# Altium PCB PCB1.PcbDoc
Units mm, origin at the board's own origin, x right, y up, seen from the top; angles counter-clockwise.
Board outline 85 x 66 mm, 2 copper layers (Top Layer, Bottom Layer), stack 1.071 mm thick; 39 components, 42 nets, 267 pads, 84 vias.
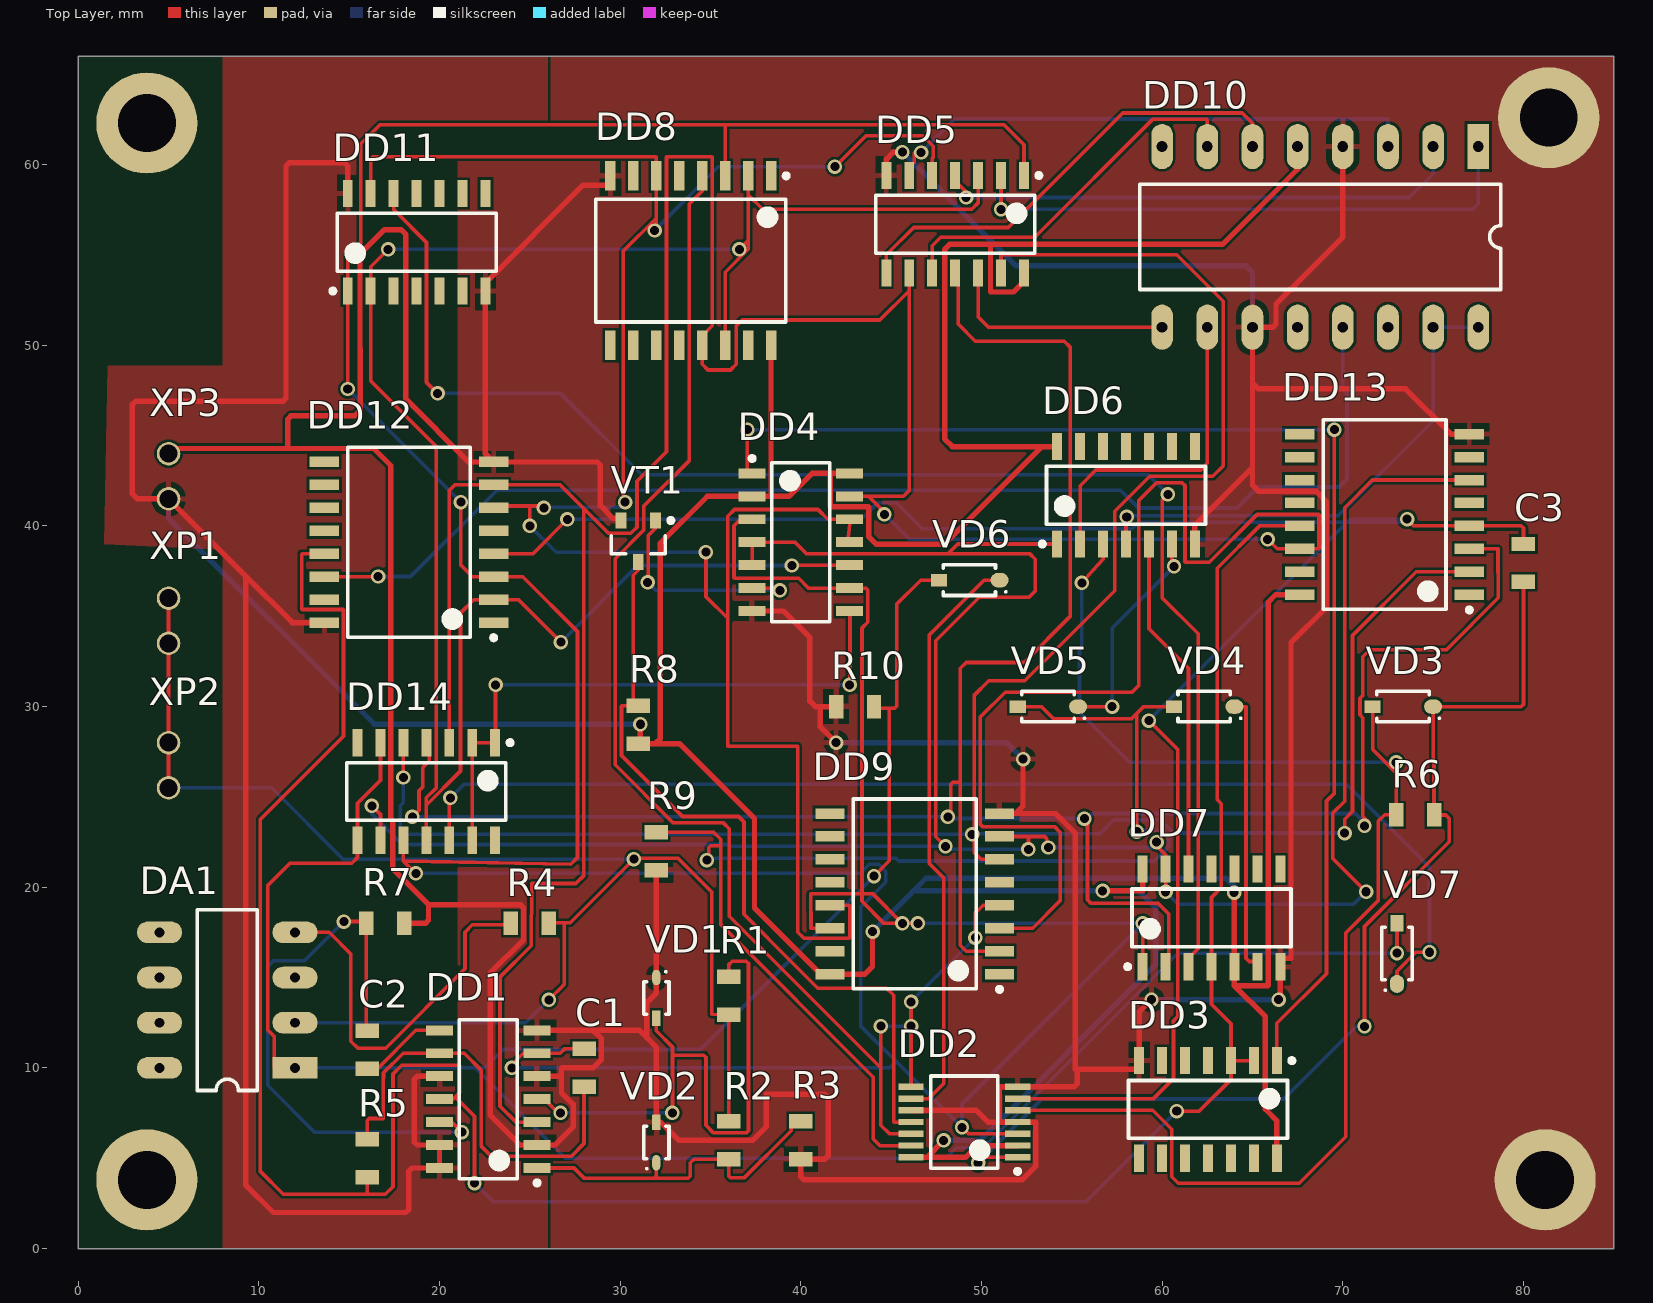
[diagram p0: Top Layer view]
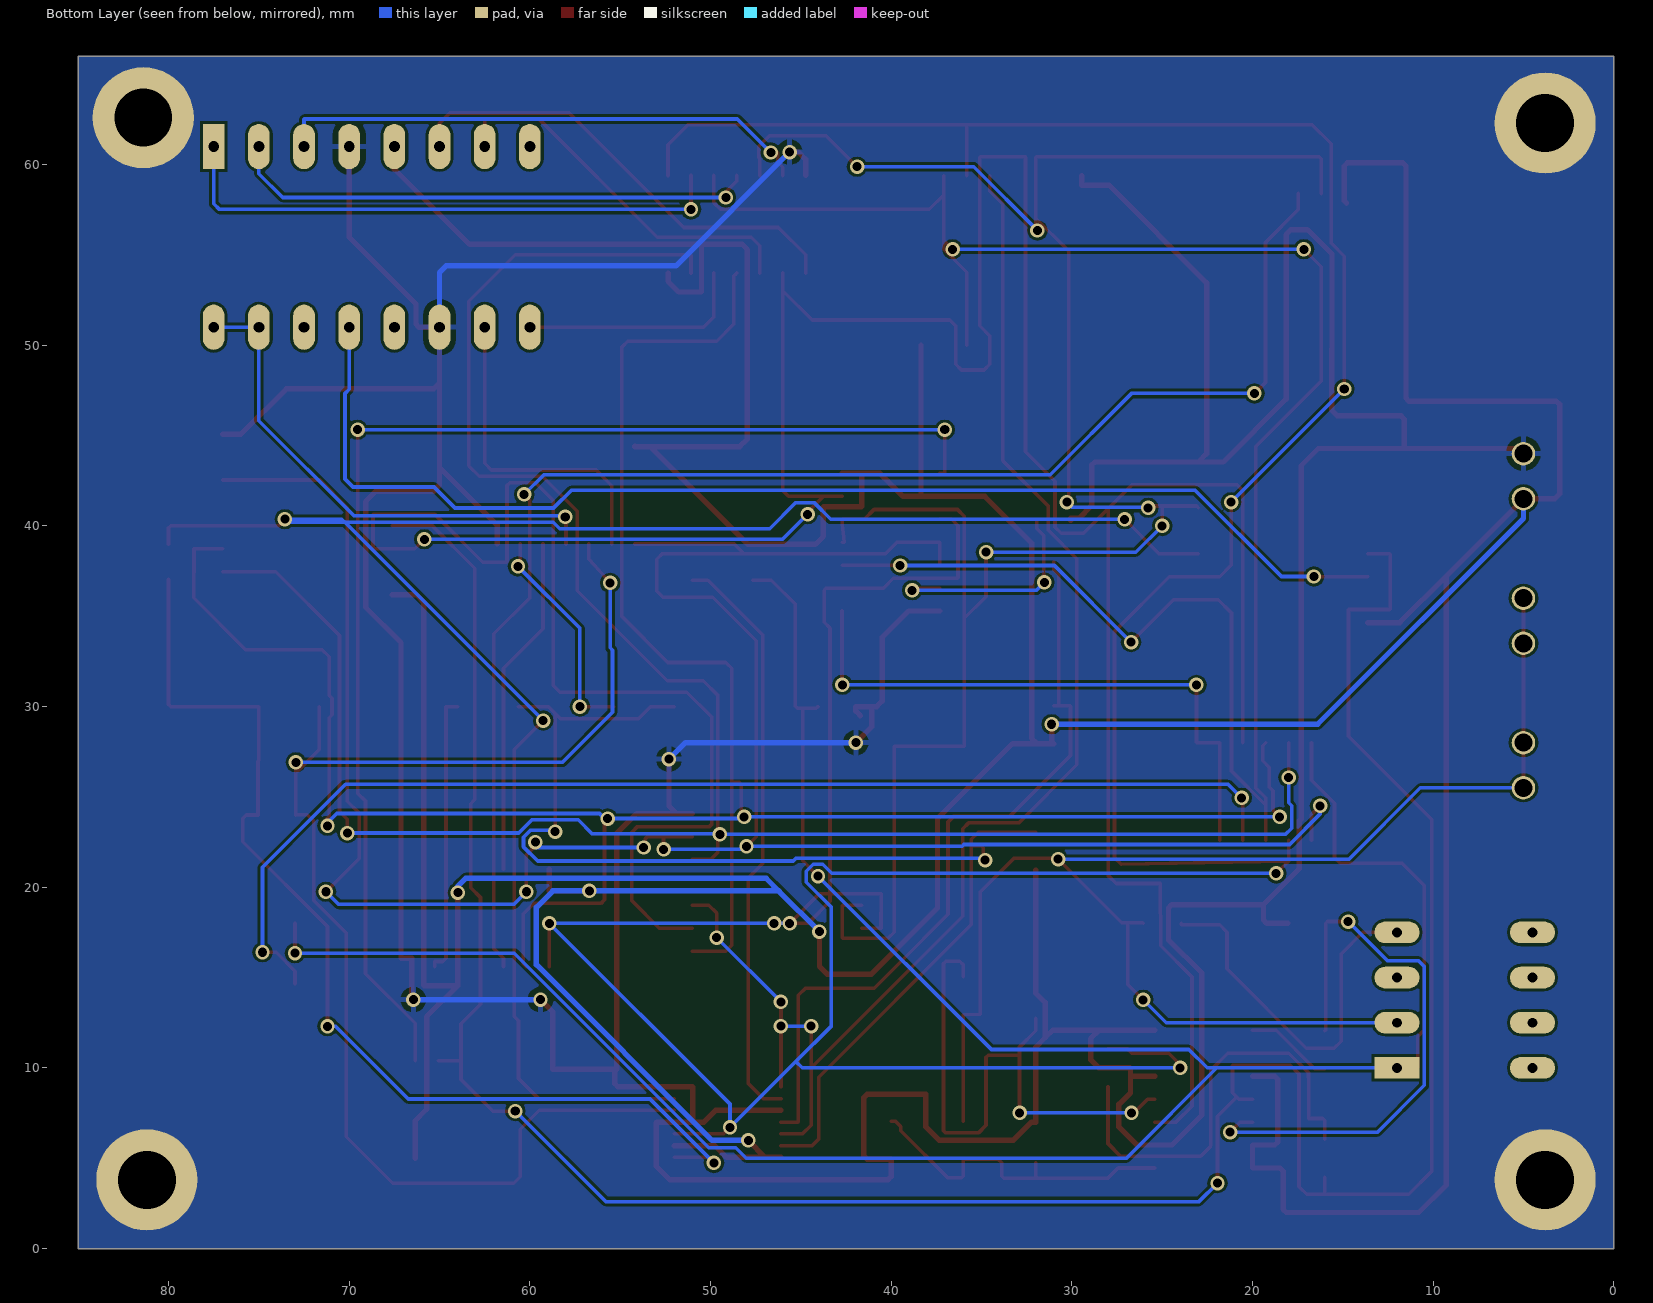
[diagram p1: Bottom Layer view, seen from below]
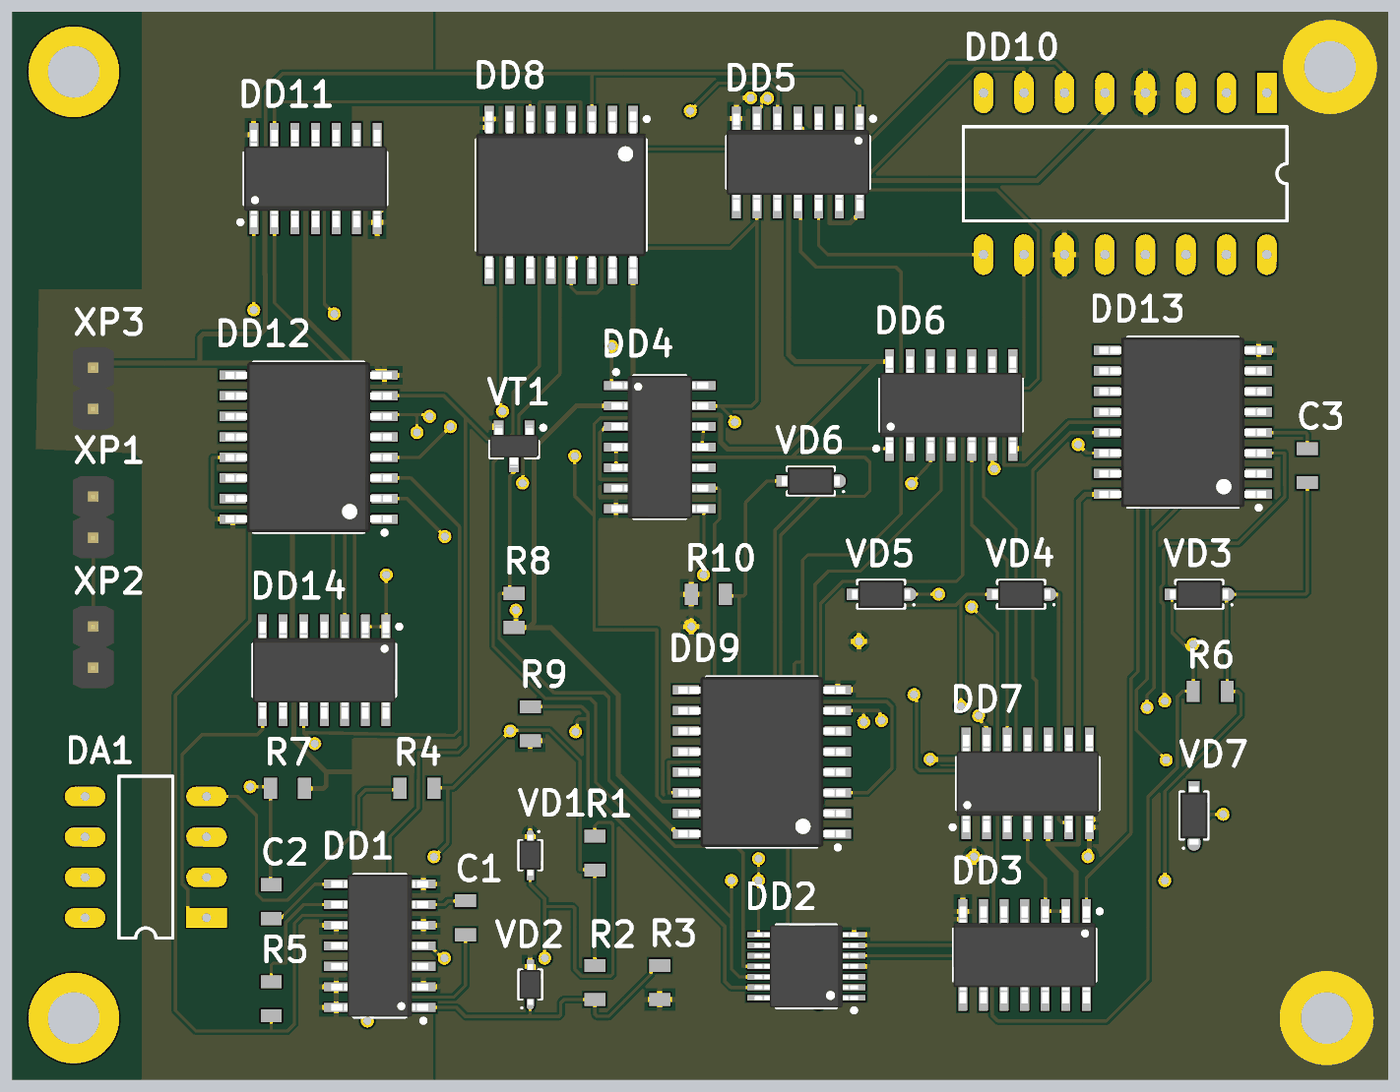
[diagram p2: 3D render of the assembled board from above, using the file's embedded part models]

## Layer stack, top to bottom
Top Solder: solder mask 0.0102, Solder Resist, Dk 3.5
Top Layer: signal copper 0.0356
Dielectric 1: dielectric 1, FR-4, Dk 4.8
Bottom Layer: signal copper 0.0356
Bottom Solder: solder mask 0.0102, Solder Resist, Dk 3.5

## Board outline
0,0 85,0 85,66 0,66

## Design rules (kind name [scope] priority, off if disabled: settings)
Clearance [All] p1: gap=0.15 ignorepadtopadclearanceinfootprint=FALSE
ComponentClearance [All] p1: gap=0 collisioncheckmode=3 verticalgap=0.254 showdistances=FALSE
HoleSize [All] p1: absolutevalues=TRUE maxlimit=3 minlimit=0.5 maxpercent=80.000 minpercent=20.000
PolygonConnect [All] p1: connectstyle=Relief reliefconductorwidth=0.3 reliefentries=4 polygonreliefangle="90 Angle" airgapwidth=0.3
RoutingVias [All] p1: holewidth=0.5 width=0.8 viastyle="Through Hole" minholewidth=0.4 minwidth=0.6 maxholewidth=0.4 maxwidth=0.6
SolderMaskExpansion [All] p1: expansion=0.102 istentingtop=FALSE
Width Width_VCC_GND [InNetClass('VCC/GND')] p1: maxlimit=0.3 minlimit=0.3 preferedwidth=0.3
Width [All] p2: maxlimit=0.25 minlimit=0.15 preferedwidth=0.2
28 further rules are at their usual default settings.

## Classes and differential pairs
net class VCC/GND: GND VCC

## Components (designator, comment, footprint, x,y, rotation, side; value= is the part's Value field where it differs from the comment)
C1 "С-0805 50 В 1 мкФ 10% X7R Hitano" 0805 28,10 r90 top value="1 мкФ"
C2 "С-0805 50 В 1 мкФ 10% X7R Hitano" 0805 16,11 r90 top value="1 мкФ"
C3 "С-0805 50 В 1 мкФ 10% X7R Hitano" 0805 80,37.95 r270 top value="1 мкФ"
DA1 "КР1014КТ1А Электроника и связь" DIP8 12,10 r180 top
DD1 "74HC86D Philips" SOIC-14 25.4,4.46 r180 top
DD2 "74HCT74PW NXP" TSSOP-14 52,5.05 r180 top
DD3 "CD74AC02M96 TI" SOIC-14 66.35,10.4 r270 top
DD4 "SN74HC10QDREP Texas Instruments" SOIC-14 37.3,42.91 r0 top
DD5 "TC74AC04F Toshiba" SOIC-14 52.35,59.4 r270 top
DD6 "TC74AC04F Toshiba" SOIC-14 54.19,39 r90 top
DD7 "SN74HC10QDREP Texas Instruments" SOIC-14 58.92,15.6 r90 top
DD8 "74AC191SC Fairchild" SOIC-16 38.35,59.38 r270 top
DD9 "74AC191SC Fairchild" SOIC-16 51,15.19 r180 top
DD10 "CD4061A NXP" DIP16 77.5,61 r270 top
DD11 "SN74HC10QDREP Texas Instruments" SOIC-14 14.92,53 r90 top
DD12 "74AC191SC Fairchild" SOIC-16 23,34.65 r180 top
DD13 "74AC191SC Fairchild" SOIC-16 77,36.19 r180 top
DD14 "SN74HC10QDREP Texas Instruments" SOIC-14 23.08,28 r270 top
R1 "R-0805 0,125 Вт 390 кОм 5 % Hitano" 0805 36,14 r90 top value="390 кОм"
R2 "R-0805 0,125 Вт 433,5 кОм 5 % Hitano" 0805 36,6 r90 top value="433,5 кОм"
R3 "R-0805 0,125 Вт 76,5 кОм 5 % Hitano" 0805 40,6 r90 top value="76,5 кОм"
R4 "R-0805 0,125 Вт 39 кОм 5 % Hitano" 0805 25,18 r180 top value="39 кОм"
R5 "R-0805 0,125 Вт 100 кОм 5 % Hitano" 0805 16,5 r270 top value="100 кОм"
R6 "R-0805 0,125 Вт 82 кОм 5 % Hitano" 0805 74,24 r0 top value="82 кОм"
R7 "R-0805 0,125 Вт 82 кОм 5 % Hitano" 0805 17,18 r0 top value="82 кОм"
R8 "R-0805 0,125 Вт 100 кОм 5 % Hitano" 0805 31,29 r270 top value="100 кОм"
R9 "R-0805 0,125 Вт 100 кОм 5 % Hitano" 0805 32,22 r270 top value="100 кОм"
R10 "R-0805 0,125 Вт 100 кОм 5 % Hitano" 0805 43,30 r0 top value="100 кОм"
VD1 "BZX384 NXP" SOD-323 32,15 r270 top
VD2 "BZX384 NXP" SOD-323 32,4.75 r90 top
VD3 "1N4148W Yangjie" SOD-123 75,30 r180 top
VD4 "1N4148W Yangjie" SOD-123 64,30 r180 top
VD5 "1N4148W Yangjie" SOD-123 55.35,30 r180 top
VD6 "1N4148W Yangjie" SOD-123 51,37 r180 top
VD7 "1N4148W Yangjie" SOD-123 73,14.65 r90 top
VT1 "BC856B Infineon" SOT-23 31.95,40.3 r270 top
XP1 "DS1021 Ningbo Zhenqin Electronic" PLS-2 5,36 r270 top
XP2 "DS1021 Ningbo Zhenqin Electronic" PLS-2 5,25.5 r90 top
XP3 "DS1021 Ningbo Zhenqin Electronic" PLS-2 5,41.5 r90 top

## Footprints (in the part's own frame and the unit in brackets; to place one, negate y for a bottom-side part, rotate by r counter-clockwise, add the part's x,y. Pads: shape width x height; smd on the part's side, far side on the other; paste and mask are expansions set on the pad)
0805 [mm]
  rect 0.8x1.3 smd: 1(-1.05,0) 2(1.05,0)
  body extent -1.03,-0.65 1.07,0.65, height 0.4
DIP8 [mm]
  rect 2.5x1.2 hole 0.55: 1(0,0)
  oval 2.5x1.2 hole 0.55: 2(0,-2.5) 3(0,-5) 4(0,-7.5) 5(7.5,-7.5) 6(7.5,-5) 7(7.5,-2.5) 8(7.5,0)
  silkscreen extent 2.08,-8.75 5.42,1.25, body extent 0.83,-8.7 6.83,1.3, height 5
DIP16 [mm]
  rect 2.5x1.2 hole 0.6: 1(0,0)
  oval 2.5x1.2 hole 0.6: 2(0,-2.5) 3(0,-5) 4(0,-7.5) 5(0,-10) 6(0,-12.5) 7(0,-15) 8(0,-17.5) 9(10,-17.5) 10(10,-15) 11(10,-12.5) 12(10,-10) 13(10,-7.5) 14(10,-5) 15(10,-2.5) 16(10,0)
  silkscreen extent 2.08,-18.75 7.91,1.25, body extent 0.43,-18.72 9.43,1.27, height 5
PLS-2 [mm]
  round 1.3 hole 1: 1(0,0) 2(2.5,0)
  body extent -1.31,-1.27 3.77,1.27, height 8.47
SOD-123 [mm] "SODFL, 2-Leads, Body 1,55x3,60mm, IPC Medium Density"
  oval 1x0.8 smd: 1(0,0)
  rect 0.9x0.7 smd: 2(3.35,0)
  silkscreen extent -0.4,-0.85 3.12,0.85, body extent -0.12,-0.85 3.47,0.85, height 1.35
SOD-323 [mm] "SODFL, 2-Leads, Body 1,25x2,50mm, IPC Medium Density"
  oval 0.85x0.45 smd: 1(0,0)
  rect 0.85x0.45 smd: 2(2.25,0)
  silkscreen extent -0.37,-0.7 2.02,0.7, body extent -0.13,-0.67 2.37,0.67, height 1.1
SOIC-14 [mm] "SOIC, 14-Leads, Body 8,65x3,90mm, Pitch 1,27mm, IPC Medium Density"
  rect 1.5x0.55 smd: 1(0,0) 2(0,-1.27) 3(0,-2.54) 4(0,-3.81) 5(0,-5.08) 6(0,-6.35) 7(0,-7.62) 8(5.4,-7.62) 9(5.4,-6.35) 10(5.4,-5.08) 11(5.4,-3.81) 12(5.4,-2.54) 13(5.4,-1.27) 14(5.4,0)
  silkscreen extent -0.13,-8.21 4.3,0.95, body extent -0.3,-8.21 5.7,0.59, height 1.75
SOIC-16 [mm] "SOIC, 16-Leads, Body 10,30x7,50mm, Pitch 1,27mm, IPC Medium Density"
  rect 1.62x0.58 smd: 1(0,0) 2(0,-1.27) 3(0,-2.54) 4(0,-3.81) 5(0,-5.08) 6(0,-6.35) 7(0,-7.62) 8(0,-8.89) 9(9.38,-8.89) 10(9.38,-7.62) 11(9.38,-6.35) 12(9.38,-5.08) 13(9.38,-3.81) 14(9.38,-2.54) 15(9.38,-1.27) 16(9.38,0)
  silkscreen extent -0.12,-9.7 8.09,0.97, body extent -0.46,-9.69 9.84,0.8, height 2.65
SOT-23 [mm] "SOT23, 3-Leads, Body 2,90x2,30mm, Pitch 0,95mm, IPC Medium Density"
  rect 0.9x0.6 smd: 1(0,0) 2(0,-1.9) 3(2.3,-0.95)
  silkscreen extent -0.12,-2.45 1.85,0.98, body extent -0.15,-2.45 2.45,0.55, height 1.1
TSSOP-14 [mm] "TSOP, 14-Leads, Body 5,00x4,40mm, Pitch 0,65mm, IPC Medium Density"
  rect 1.4x0.35 smd: 1(0,0) 2(0,-0.65) 3(0,-1.3) 4(0,-1.95) 5(0,-2.6) 6(0,-3.25) 7(0,-3.9) 8(5.9,-3.9) 9(5.9,-3.25) 10(5.9,-2.6) 11(5.9,-1.95) 12(5.9,-1.3) 13(5.9,-0.65) 14(5.9,0)
  silkscreen extent -0.13,-4.5 4.8,0.9, body extent -0.25,-4.5 6.15,0.6, height 1.1

## Part data
C1 C2 C3: library part "C-0805 1 мкФ", Manufacturer=Hitano, Package=С-0805, Temp_Coef=X7R, Tolerance=10%, Voltage="50 В"
DA1: library part КР1014КТ1А, Manufacturer="Электроника и связь", Name=КР1014КТ1А
DD1: library part 74HC86D, "OR", Manufacturer=Philips, Name=74HC86D
DD2: library part 74HCT74PW, "DUAL D FF POSEDG TRIG", Manufacturer=NXP, Name=74HCT74PW
DD3: library part CD74AC02M96, "2-INPUT NOR GATE", Manufacturer=TI, Name=CD74AC02M96
DD4 DD7 DD11 DD14: library part SN74HC10QDREP, "3-INPUT NAND GATE", Manufacturer="Texas Instruments", Name=SN74HC10QDREP
DD5 DD6: library part TC74AC04F, "NOT", Manufacturer=Toshiba, Name=TC74AC04F
DD8 DD9 DD12 DD13: library part 74AC191SC, "Counter", Manufacturer=Fairchild, Name=74AC191SC
DD10: library part CD4061A, Manufacturer=NXP, Name=CD4061A
R1: library part "R-0805 390 кОм", Manufacturer=Hitano, Package=R-0805, Power="0,125 Вт", Tolerance="5 %"
R2: library part "R-0805 433,5 кОм", Manufacturer=Hitano, Package=R-0805, Power="0,125 Вт", Tolerance="5 %"
R3: library part "R-0805 76,5 кОм", Manufacturer=Hitano, Package=R-0805, Power="0,125 Вт", Tolerance="5 %"
R4: library part "R-0805 39 кОм", Manufacturer=Hitano, Package=R-0805, Power="0,125 Вт", Tolerance="5 %"
R5 R8 R9 R10: library part "R-0805 100 кОм", Manufacturer=Hitano, Package=R-0805, Power="0,125 Вт", Tolerance="5 %"
R6 R7: library part "R-0805 82 кОм", Manufacturer=Hitano, Package=R-0805, Power="0,125 Вт", Tolerance="5 %"
VD1 VD2: library part BZX384, Manufacturer=NXP, Name=BZX384
VD3 VD4 VD5 VD6 VD7: library part 1N4148W, "1N4148W", Manufacturer=Yangjie, Name=1N4148W
VT1: library part BC856B, Manufacturer=Infineon, Name=BC856B
XP1 XP2 XP3: library part DS1021, "PLS-2_1x2", Manufacturer="Ningbo Zhenqin Electronic", Name=DS1021

## Free pads (board coordinates)
  round 5.6 hole 3.2: -(3.8,3.8) -(3.8,62.3) -(81.2,3.8) -(81.4,62.6)

## Via types
v1: diameter 0.8, hole 0.5, Top Layer to Bottom Layer, 84 vias

## Nets (pads, with @x,y where several pads share a name; then routed paths per layer and width w, separated by ;. In a path a pad name is that pad's centre, name@x,y a point inside that pad or via, vN(x,y) a via of type N, cw(c..) or ccw(c..) an arc to the next point about the centre after c; other vN are vias at no path point)
1: C1.2 DD1.6 DD2.3 DD4.3 DD4.9 DD5.1 DD7.1 DD8.3 DD9.14 DD11.1 DD12.3 DD14.10 | length 245.9
  Top Layer w0.2: v1(14.92,47.58) DD11.1 14.92,54.929 15.648,55.657 15.648,61.148 16.7,62.2 35.81,62.2 ; DD14.10 18,21.452 ; v1(18.686,20.766) 18,21.452 ; v1(21.185,41.315) 21.185,37.822 21.817,37.19 DD12.3 24.607,37.19 27.636,34.16 27.636,21.642 27.268,21.274 18,21.452 ; v1(24,10) 24,10.17 24.64,10.81 DD1.6 26.677,10.81 26.917,11.05 C1.2 ; DD8.3 35.81,62.2 ; DD4.3 36.653,40.37 36.3,40.017 36.3,37.124 36.325,37.098 39.879,37.098 40.418,36.56 DD4.9 43.588,36.56 43.7,36.448 43.7,34.66 43.384,34.344 43.384,19.644 ; DD9.14 40.565,17.73 40.54,19.623 43.384,19.644 ; v1(46.483,17.998) v1(45.62,17.998) ; v1(48.922,6.707) 49.279,6.35 DD2.3 ; DD5.1 52.35,61.101 51.251,62.2 35.81,62.2 ; DD7.1 v1(58.92,17.998) ; 43.384,19.644 43.384,19.217 44.604,17.998 v1(45.62,17.998) ; 43.384,19.644 43.969,19.649 v1(45.62,17.998)
  Bottom Layer w0.2: v1(14.92,47.58) v1(21.185,41.315) ; v1(18.686,20.766) 43.283,20.766 43.781,21.264 44.319,21.264 44.7,20.883 44.7,20.278 43.308,18.887 43.308,12.321 45.277,10.352 ; v1(24,10) 44.924,10 45.277,10.352 ; v1(45.62,17.998) v1(46.483,17.998) v1(58.92,17.998) 48.922,7.999 v1(48.922,6.707) 45.277,10.352
2: DD4.10 DD5.3 DD8.2 DD8.14 DD11.2 DD12.2 DD14.11 | length 115.6
  Top Layer w0.2: v1(17.155,55.31) 16.19,54.345 DD11.2 16.19,48.02 19.813,44.397 19.813,25.491 19.27,24.947 19.27,24.541 ; DD14.11 19.27,24.541 ; v1(26.722,33.568) 24.37,35.92 DD12.2 21.896,35.92 21.159,35.183 21.159,26.43 19.27,24.541 ; DD8.14 35.81,54.04 37.08,55.31 37.08,55.788 ; v1(36.603,55.31) 37.08,55.788 ; DD8.2 37.08,58.333 ; v1(39.498,37.81) 39.519,37.83 DD4.10 ; DD5.3 49.81,57.879 49.455,57.524 37.889,57.524 37.08,58.333 ; 37.08,55.788 37.08,58.333
  Bottom Layer w0.2: v1(17.155,55.31) v1(36.603,55.31) ; v1(26.722,33.568) 30.964,37.81 v1(39.498,37.81)
3: DD4.11 DD4.12 DD5.5 DD8.6 DD9.13 DD11.13 DD12.6 | length 122.8
  Top Layer w0.2: DD11.13@16.19,58.866 DD11.13 16.2,58.41 16.2,60.324 16.317,60.441 31.975,60.441 32,60.416 DD8.6 32,57.037 ; DD12.6 23.1,41.1 24.9,41.1 ; v1(25,40) 25,41 24.9,41.1 ; v1(25.772,41) 25.672,41.1 24.9,41.1 ; v1(30.278,41.315) 30.176,41.416 30.176,55.214 32,57.037 ; v1(31.904,56.352) 32,56.448 32,57.037 ; v1(34.748,38.546) 34.748,36.082 35.95,34.881 ; DD9.13 42.673,19 42.699,18.975 42.699,17.21 42.673,17.185 40.159,17.185 39.828,17.515 39.828,27.794 35.95,27.794 35.95,34.881 ; v1(41.886,59.882) 43.604,61.6 46.735,61.6 47.322,61.012 47.322,60.391 47.27,60.339 DD5.5 ; DD4.11 42.587,39.1 42.589,39.113 42.7,40.09 DD4.12 41.485,40.37 40.947,40.908 36.323,40.908 35.95,40.535 35.95,34.881
  Bottom Layer w0.2: v1(25,40) 26.454,38.546 v1(34.748,38.546) ; v1(25.772,41) 25.797,41.025 29.988,41.025 v1(30.278,41.315) ; v1(31.904,56.352) 35.434,59.882 v1(41.886,59.882)
4: DD1.3 DD4.13 DD5.9 DD8.13 DD9.3 DD12.7 DD13.14 DD14.3 | length 212
  Top Layer w0.2: DD14.3 20.54,40.66 20.535,40.665 20.535,41.965 20.84,42.27 DD12.7 26.676,42.27 27.992,40.954 ; DD1.3 24.234,7 23.35,7.884 23.35,15.032 25.071,16.753 25.096,20.207 27.547,20.207 27.992,20.652 27.992,40.954 ; DD4.13 43.74,41.64 ; v1(44.629,40.642) 44.629,40.751 43.74,41.64 ; DD5.9 46,53.024 ; DD9.3 52.83,17.73 54.35,19.25 54.35,23.05 54.043,23.357 50.057,23.357 49.94,23.474 49.94,29.43 51.309,30.799 58.332,30.799 58.701,31.167 58.701,41.406 59.691,42.397 61.103,42.397 61.266,42.234 61.266,38.013 61.291,37.987 62.612,37.987 65.254,40.629 68.657,40.629 68.683,40.604 68.683,38.755 68.657,38.73 DD13.14 66.371,38.73 v1(65.844,39.257) ; 27.992,40.954 29.358,39.588 30.583,39.588 30.928,39.933 30.928,42.473 32.564,44.109 32.564,60.416 32.589,60.441 35.079,60.441 35.104,60.416 35.104,51.074 34.54,50.51 DD8.13 34.54,48.947 34.858,48.63 36.107,48.63 36.425,48.947 36.425,51.068 36.755,51.399 44.374,51.399 46,53.024 ; 43.74,41.64 45.678,41.64 46,41.962 46,53.024
  Bottom Layer w0.2: v1(44.629,40.642) 46.013,39.257 v1(65.844,39.257)
5: DD5.11 DD7.2 DD9.2 DD13.3 DD14.4 | length 144.9
  Top Layer w0.2: v1(18.492,23.89) 18.867,24.265 18.867,25.344 19.067,25.544 19.067,26.623 19.437,26.993 19.437,27.833 19.378,27.892 DD14.4 ; v1(48.134,23.89) 48.301,24.057 48.301,25.687 48.418,25.804 48.832,25.804 ; DD5.11 48.648,53.892 48.707,53.833 48.707,51.174 49.659,50.222 54.587,50.222 54.905,49.904 54.905,34.982 52.365,32.442 49.149,32.442 48.832,32.124 48.832,25.804 ; DD9.2 50.996,16.464 49.157,16.464 48.832,16.789 48.832,25.804 ; v1(55.7,23.8) 55.808,23.692 55.867,23.633 55.867,19.304 56.066,19.104 59.782,19.104 60.357,18.529 60.357,15.767 DD7.2 ; v1(71.2,23.4) 71.367,23.567 71.367,23.663 71.332,23.698 71.11,23.92 71.11,29.386 70.95,29.546 70.95,30.454 71.11,30.614 71.11,32.759 71.504,33.153 75.745,33.153 78.611,36.018 78.588,38.734 77.004,38.734 DD13.3
  Bottom Layer w0.2: v1(18.492,23.89) 18.506,23.904 48.12,23.904 48.22,23.804 55.696,23.804 v1(55.7,23.8) 55.862,23.8 56.144,24.082 70.689,24.082 70.99,23.78 70.99,23.772 71.2,23.562 v1(71.2,23.4)
6: DD5.13 DD9.6 DD13.2 DD14.5 | length 132.3
  Top Layer w0.2: v1(18,26.075) DD14.5 ; v1(49.482,22.925) v1@49.59,22.925 ; DD9.6 49.979,21.54 49.59,21.929 49.59,22.663 v1@49.59,22.925 ; DD5.13 51.08,54.98 51.105,55.005 60.809,55.005 63.374,52.44 63.374,43.321 62.799,42.747 59.313,42.747 57.38,40.813 57.38,36.413 52.401,31.434 50.407,31.434 49.59,30.617 v1@49.59,22.925 ; v1(70.1,23) 70.1,23.771 70.537,24.208 70.537,33.929 74.068,37.46 DD13.2
  Bottom Layer w0.2: v1(18,26.075) 18,24.673 17.832,24.505 17.832,23.266 18.173,22.925 v1(49.482,22.925) ; v1@49.482,22.95 56.55,22.95 57.328,23.728 59.887,23.728 60.614,23 v1(70.1,23)
7: DD4.4 DD4.5 DD6.1 DD7.13 DD9.7 DD13.6 DD14.9 | length 138.1
  Top Layer w0.2: v1(16.257,24.5) 16.73,24.027 DD14.9 ; DD4.5 DD4.4 39.676,39.1 40.306,38.47 48.16,38.47 ; v1(48.007,22.265) 47.474,22.798 47.474,33.644 49.88,36.05 52.63,36.05 52.973,36.393 52.973,38.152 52.655,38.47 48.16,38.47 ; DD9.7 52.5,22.81 ; v1@52.3,22.2 52.4,22.1 v1(52.6,22.1) 52.6,22.71 52.5,22.81 ; v1(53.7,22.2) 53.603,22.297 53.603,22.693 53.486,22.81 52.5,22.81 ; DD6.1 48.69,39 48.16,38.47 ; v1(59.7,22.5) 59.7,22.281 60.19,21.791 DD7.13 v1(60.19,19.75) ; v1(71.286,19.75) 69.45,21.586 69.45,24.103 70.105,24.759 70.105,41.01 71.635,42.54 DD13.6
  Bottom Layer w0.2: v1(16.257,24.5) 16.257,24.049 17.943,22.363 35.966,22.363 36.064,22.265 v1(48.007,22.265) 48.172,22.1 v1(52.6,22.1) ; v1(53.7,22.2) 59.652,22.2 v1@59.717,22.265 ; v1(60.19,19.75) 60.891,19.049 70.585,19.049 v1(71.286,19.75)
8: DD2.8 DD2.12 DD8.4 DD9.4 | length 80.7
  Top Layer w0.2: DD8.4 34.54,58.536 33.834,57.83 33.834,43.626 31.294,41.086 31.294,39.753 29.719,38.178 29.719,26.781 32.94,23.56 35.714,23.56 36.044,23.23 36.044,18.391 44.426,10.009 ; v1(44.426,12.308) 44.426,10.009 ; DD2.12 44.908,6.35 44.426,6.833 44.426,10.009 ; DD2.8 v1(46.1,12.308) 46.1,13.652 v1(46.102,13.654) ; v1(49.658,17.21) 49.658,18.568 50.09,19 DD9.4
  Bottom Layer w0.2: v1(44.426,12.308) v1(46.1,12.308) ; v1(46.102,13.654) v1(49.658,17.21)
9: DD1.11 DD3.2 DD3.3 DD7.4 DD12.13 DD13.13 R5.2 | length 147.7
  Top Layer w0.2: DD12.13 12.396,38.46 12.371,38.435 12.371,35.397 12.396,35.371 14.657,35.371 14.682,35.346 14.682,28.361 10.085,23.763 10.085,4.267 11.352,3 16,3 ; R5.2 16,3 ; DD1.11 20.754,8.27 20.868,8.384 ; v1(21.936,3.621) 21.936,7.315 20.868,8.384 ; v1(60.809,7.609) 62.057,7.609 63.81,9.362 DD3.3 ; DD3.2 DD3.3 ; DD13.13 65.387,40 63.044,37.657 63.044,24.856 63.273,24.627 63.273,19.979 62.73,19.436 DD7.4 62.73,13.515 63.81,12.435 DD3.3 ; 16,3 17,3 17.426,3.426 17.426,9.666 17.908,10.149 21.083,10.149 21.109,10.124 21.109,8.625 20.868,8.384
  Bottom Layer w0.2: v1(21.936,3.621) 22.958,2.6 55.8,2.6 v1(60.809,7.609)
GND: DD1.2 DD1.5 DD1.7 DD2.4 DD2.7 DD2.10 DD3.7 DD4.7 DD5.7 DD6.7 DD7.7 DD8.8 DD9.8 DD10.4 DD10.11 DD11.7 DD12.8 DD13.8 pad.- R3.1 R7.2 R9.2 R10.1 VD1.1 VD2.2 VT1.2 XP3.2 | length 363
  Top Layer w0.3: XP3.2 5.271,44 5.557,44.287 11.6,44.287 ; R7.2 19.215,18 19.39,18.176 19.39,19.034 ; DD1.5 26.71,9.54 26.75,9.5 ; DD1.7 28.5,12.08 ; DD8.8 29.46,58.866 27.95,58.866 22.54,53.456 DD11.7 22.54,44 DD12.8 ; VT1.2 30.05,40.416 29.604,40.416 28.9,41.119 28.9,43.364 28.724,43.54 DD12.8 ; R9.2 VD1.1 32,14.157 31.472,13.629 31.472,11.668 ; DD4.7 39.041,35.29 40.5,33.831 40.5,30.3 40.8,30 41,30 ; R10.1@41.7,29.5 41.95,29.75 R10.1 41,30 ; v1(41.95,28.005) 41.077,28.878 41.077,29.923 41,30 ; DD5.7 44.73,60.289 45.136,60.695 v1(45.62,60.695) ; DD2.10 49.718,7.65 50.368,7 51.004,7 ; DD9.8 51.88,24.08 ; v1(52.3,27.091) 52.3,24.5 51.88,24.08 ; v1(59.412,13.781) 58.73,13.099 DD3.7 58.73,9.92 55.402,9.92 55.3,9.818 ; DD6.7 61.81,40.055 65,43.245 ; DD10.11 DD10.11@65,50.992 ; v1(66.448,13.781) 66.54,13.874 DD7.7 66.54,16.067 67.108,16.067 67.133,16.093 67.133,33.542 69.089,35.498 69.089,41.34 68.505,41.924 65.33,41.924 65,42.254 65,43.245 ; DD10.4 70,55.996 66.3,52.296 66.3,51.168 66.124,50.992 DD10.11@65,50.992 ; DD13.8 75.992,45.08 73.483,47.589 65.33,47.589 65,47.919 ; 11.6,44.287 16.359,44.287 17.3,43.345 17.3,28.879 17.305,28.874 17.305,26.919 17.3,26.914 17.3,23.773 17.4,23.673 17.4,21.024 19.39,19.034 ; 11.6,44.287 11.6,45.914 11.776,46.09 15.305,46.09 15.622,46.407 15.622,49.798 15.597,49.824 15.597,55.04 16.959,56.402 17.857,56.402 18.137,56.123 18.137,47.017 21.614,43.54 DD12.8 ; 19.39,19.034 24.474,19.034 24.65,18.858 24.65,17.091 22.8,15.241 22.8,7.391 24.461,5.73 DD1.2 26.392,5.73 27.397,6.734 27.397,7.976 26.75,8.622 26.75,9.5 ; 26.75,9.5 26.75,9.95 26.8,10 28.503,10 28.957,10.454 28.957,11.623 28.5,12.08 ; 28.5,12.08 31.06,12.08 31.472,11.668 ; 31.472,11.668 32,11.14 VD2.2 32.233,7 33.233,6 37.348,6 38.083,6.736 38.083,8.538 41.334,8.538 41.509,8.362 41.509,5.126 41.334,4.95 R3.1 40,3.976 40.176,3.8 52.25,3.8 53.011,4.561 53.011,6.975 52.986,7 DD2.4 51.004,7 ; 51.004,7 50.979,7.025 50.979,8.925 51.004,8.95 DD2.7 55.124,8.95 55.3,9.126 55.3,9.818 ; 51.88,24.08 54.097,24.08 55.2,22.977 55.2,9.918 55.3,9.818 ; 65,43.245 65,47.919 ; 65,47.919 DD10.11@65,50.992
  Bottom Layer w0.3: v1(41.95,28.005) 51.385,28.005 v1(52.3,27.091) ; v1(45.62,60.695) 51.919,54.396 64.632,54.396 65,54.027 DD10.11 ; v1(59.412,13.781) v1(66.448,13.781)
NetC1_1: C1.1 DD1.9 R5.1 | length 24.3
  Top Layer w0.2: R5.1 16,7.083 16.117,7.2 16.892,7.2 16.892,9.439 16.9,9.446 16.9,9.725 17.985,10.81 DD1.9 21.371,10.81 22.3,9.881 22.3,5.681 22.881,5.1 27.286,5.1 28,5.814 C1.1
NetC2_1: C2.1 DD1.8 | length 4.9
  Top Layer w0.2: C2.1 16.562,9.95 18.692,12.08 DD1.8
NetC2_2: C2.2 DD1.12 R7.1 | length 32.4
  Top Layer w0.2: v1(14.7,18.1) 15.85,18.1 R7.1 15.95,12.1 C2.2 ; DD1.12 20.677,7 v1(21.236,6.441)
  Bottom Layer w0.2: v1(14.7,18.1) 12.528,15.927 10.809,15.927 10.491,15.61 10.491,9.031 13.082,6.441 v1(21.236,6.441)
NetC3_1: C3.1 DD2.6 DD12.4 DD13.4 | length 108.7
  Top Layer w0.2: DD12.4 25.173,38.46 v1(27.076,40.364) ; DD2.6 59.519,8.3 60.631,9.412 60.631,12.613 60.86,12.841 60.86,27.624 v1(59.259,29.224) ; v1(73.56,40.375) 73.935,40 DD13.4 79.883,40 80,39.883 C3.1
  Bottom Layer w0.2: v1(27.076,40.364) 43.344,40.364 44.272,41.292 45.279,41.292 46.72,39.851 58.349,39.851 58.701,40.203 70.238,40.203 ; v1(59.259,29.224) 70.238,40.203 ; 70.238,40.203 73.387,40.203 v1(73.56,40.375) 70.41,40.375 70.238,40.203
NetC3_2: C3.2 DD2.1 R6.2 VD3.1 | length 59.2
  Top Layer w0.2: v1(49.811,4.739) 50.122,5.05 DD2.1 ; v1(71.2,12.3) 71.2,17.823 75.9,22.523 75.9,23.8 75.7,24 R6.2 75.05,26.964 75,27.014 VD3.1 79.883,30 80,30.117 C3.2@80,37.035
  Bottom Layer w0.2: v1(49.811,4.739) 53.347,8.275 66.733,8.275 70.758,12.3 v1(71.2,12.3)
NetDA1_1: DA1.1 DD14.6 DD14.8 R10.2 VD6.2 VD7.2 | length 139.3
  Top Layer w0.2: DA1.1 10.85,10 10.85,11.741 10.491,12.1 10.491,20.093 11.723,21.325 15.142,21.325 15.46,21.642 DD14.8 15.46,24.652 16.73,25.922 DD14.6 ; v1(44.05,20.614) 44.9,21.464 44.9,29.9 ; R10.2 44.15,29.9 44.9,29.9 ; VD6.2 46.635,37 45.3,35.665 45.3,30.017 45.183,29.9 44.9,29.9 ; v1(73.001,16.347) VD7.2
  Bottom Layer w0.2: DA1.1 21.972,10 ; v1(44.05,20.614) 34.451,11.015 23.524,11.015 22.509,10 21.972,10 ; v1(73.001,16.347) 60.86,16.347 50.09,5.577 48.596,5.577 48.022,5.003 26.969,5.003 21.972,10
NetDA1_2: DA1.2 R1.1 R2.2 R4.1 XP1.1 XP1.2 XP2.1 XP2.2 | length 82
  Top Layer w0.2: XP2.1 XP2.2 XP1.2 XP1.1 ; v1(26.05,13.77) 26.9,14.62 26.9,18.035 ; R4.1 26.085,18.035 26.9,18.035 ; R2.2 R1.1 35.079,12.975 35.079,19.721 33.2,21.6 30.807,21.6 27.242,18.035 26.9,18.035
  Bottom Layer w0.2: XP2.1 10.711,25.5 14.657,21.554 v1(30.761,21.554) ; DA1.2 24.78,12.5 v1(26.05,13.77)
NetDA1_4: DA1.4 R4.2 | length 21.5
  Top Layer w0.2: DA1.4 13.895,17.5 15.089,16.306 15.089,11.482 15.482,11.089 17.019,11.089 21.411,15.481 21.411,17.515 21.815,17.918 23.95,17.918 R4.2
NetDD1_1: DD1.1 R2.1 R3.2 VD2.1 | length 19
  Top Layer w0.2: DD1.1 27.44,4.46 28,3.9 31.883,3.9 ; VD2.1 32,4.017 31.883,3.9 ; R3.2 39.763,7.05 39.463,6.75 39.463,6.513 36.859,3.909 36.117,3.909 36,4.026 R2.1 34.085,4.95 33.885,4.75 33.885,4.017 33.768,3.9 31.883,3.9
NetDD1_4: DD1.4 R1.2 VD1.2 | length 32.8
  Top Layer w0.2: DD1.4 25.808,8.27 26.57,7.507 v1(26.697,7.507) ; VD1.2 32,12.054 32.894,11.16 32.894,10.7 ; v1(32.894,7.507) 32.894,10.7 ; R1.2 36,15.7 36.2,15.9 36.983,15.9 37.1,15.783 37.1,6.517 36.983,6.4 35.17,6.4 34.748,6.822 34.748,10.583 34.631,10.7 32.894,10.7
  Bottom Layer w0.2: v1(26.697,7.507) v1(32.894,7.507)
NetDD2_5: DD2.5 DD6.3 R6.1 VD3.2 | length 77.4
  Top Layer w0.2: DD2.5 59.488,7.65 60.529,6.608 60.529,3.977 60.885,3.621 67.591,3.621 70.156,6.187 70.156,17.464 71.959,19.268 71.959,23.662 72.315,24.017 R6.1@72.95,24.017 ; v1(55.555,36.846) 56.73,38.153 DD6.3 ; VD3.2 71.65,27.629 72.95,26.329 ; R6.1 R6.1@72.95,24.017 ; v1(72.95,26.913) 72.95,26.329 ; R6.1@72.95,24.017 72.95,26.329
  Bottom Layer w0.2: v1(55.555,36.846) 55.555,33.248 55.424,33.117 55.424,29.682 58.193,26.913 v1(72.95,26.913)
NetDD2_9: DD2.9 VD6.1 | length 32.5
  Top Layer w0.2: DD2.9 47.073,8.3 47.906,9.133 47.906,20.512 47.118,21.3 47.118,33.974 50.144,37 VD6.1
NetDD2_11: DD2.11 R8.1 VT1.3 | length 43.3
  Top Layer w0.2: R8.1 R8.1@30.725,30.05 ; VT1.3 31,37.543 30.725,37.268 R8.1@30.725,30.05 ; DD2.11 45.162,7 45.137,7.025 45.137,14.022 44.743,14.416 40.94,14.416 39.53,15.826 36.857,18.5 36.857,23.611 36.552,23.916 33.453,23.916 30.075,27.294 30.075,30.025 30.1,30.05 R8.1@30.725,30.05
NetDD2_13: DD2.13 R9.1 VD4.2 VD5.2 | length 71.7
  Top Layer w0.2: R9.1 35.167,23.05 35.561,22.656 35.561,22.3 ; v1(34.8,21.5) 34.9,21.6 34.9,22.183 35.017,22.3 35.561,22.3 ; DD2.13 44.375,5.7 44.016,6.059 44.016,9.484 35.561,17.939 35.561,22.3 ; VD5.2 53.316,30 53.99,29.326 58.306,29.326 58.599,29.619 ; v1(58.599,23.078) 58.599,29.619 ; VD4.2 58.98,30 58.599,29.619
  Bottom Layer w0.2: v1(34.8,21.5) 34.914,21.614 45.26,21.614 45.424,21.45 59.569,21.45 60.35,22.231 60.35,22.769 59.969,23.15 58.671,23.15 v1(58.599,23.078)
NetDD3_1: DD3.1 DD4.1 | length 71.4
  Top Layer w0.2: v1(37.034,45.328) 37.034,42.91 DD4.1 ; DD3.1 66.35,12.464 69.1,15.214 69.1,24.771 69.537,25.208 v1(69.537,45.328)
  Bottom Layer w0.2: v1(37.034,45.328) v1(69.537,45.328)
NetDD4_6: DD4.6 VT1.1 | length 12.7
  Top Layer w0.2: v1(31.523,36.87) 31.523,37.274 31.55,37.302 31.55,39.467 31.95,39.867 VT1.1 ; DD4.6 38.716,36.56 v1(38.838,36.438)
  Bottom Layer w0.2: v1(31.523,36.87) 31.954,36.438 v1(38.838,36.438)
NetDD4_8: DD4.8 DD14.1 DD14.2 DD14.13 | length 33.6
  Top Layer w0.2: DD14.13 DD14.2 DD14.1 23.1,28.02 v1(23.1,31.2) ; v1(42.699,31.206) 42.724,31.231 42.724,35.29 DD4.8
  Bottom Layer w0.2: v1(23.1,31.2) 42.693,31.2 v1(42.699,31.206)
NetDD5_2: DD5.2 DD10.1 | length 31.6
  Top Layer w0.2: v1(51.08,57.52) DD5.2
  Bottom Layer w0.2: v1(51.08,57.52) 77.183,57.52 77.5,57.837 DD10.1
NetDD5_4: DD5.4 DD10.2 | length 29.4
  Top Layer w0.2: DD5.4 48.54,59.095 49.15,58.485 v1(49.15,58.18)
  Bottom Layer w0.2: v1(49.15,58.18) 73.679,58.18 75,59.501 DD10.2
NetDD5_6: DD5.6 DD10.3 | length 29.9
  Top Layer w0.2: DD5.6 46,59.85 46.281,60.131 46.281,60.646 46.305,60.67 v1(46.661,60.67)
  Bottom Layer w0.2: v1(46.661,60.67) 48.515,62.524 72.475,62.524 72.5,62.498 DD10.3
NetDD5_8: DD5.8 DD10.6 | length 26
  Top Layer w0.2: DD5.8 44.73,55.005 46.242,56.517 51.485,56.517 57.821,62.854 64.429,62.854 65,62.282 DD10.6
NetDD5_10: DD5.10 DD10.7 | length 21.1
  Top Layer w0.2: DD5.10 47.27,55.513 47.74,55.983 52.954,55.983 59.471,62.5 62.473,62.5 62.5,62.473 DD10.7
NetDD5_12: DD5.12 DD10.9 | length 12.9
  Top Layer w0.2: DD5.12 49.81,51.578 50.388,51 DD10.9
NetDD6_2: DD6.2 DD10.10 | length 18.3
  Top Layer w0.2: DD6.2 55.46,42.225 56.332,43.097 62.133,43.097 62.5,43.463 DD10.10
NetDD6_4: DD6.4 DD10.15 DD10.16 | length 28.4
  Top Layer w0.2: DD6.4 58,40.462 v1(58.04,40.502)
  Bottom Layer w0.2: v1(58.04,40.502) 58.091,40.553 69.724,40.553 75,45.829 DD10.15 DD10.16
NetDD6_5: DD6.5 DD7.12 | length 18.9
  Top Layer w0.2: DD6.5 59.27,34.304 61.46,32.114 DD7.12
NetDD6_6: DD6.6 VD5.1 | length 12.3
  Top Layer w0.2: VD5.1 v1(57.227,30) ; DD6.6 60.54,37.875 v1(60.656,37.759)
  Bottom Layer w0.2: v1(57.227,30) 57.227,34.33 v1(60.656,37.759)
NetDD7_3: DD7.3 DD11.12 | length 82.1
  Top Layer w0.2: DD11.12 17.46,57.511 19.28,55.691 19.28,47.944 v1(19.889,47.335) ; v1(60.313,41.747) 60.313,41.721 59.996,41.404 59.996,36.032 62.003,34.025 62.003,16.61 61.46,16.067 DD7.3
  Bottom Layer w0.2: v1(19.889,47.335) 26.697,47.335 31.192,42.839 59.221,42.839 v1(60.313,41.747)
NetDD7_6: DD7.6 VD4.1 | length 15.6
  Top Layer w0.2: VD4.1 64.619,30 64.644,29.975 64.644,16.067 64.822,15.889 65.27,15.889 DD7.6
NetDD10_13: DD10.13 DD12.14 | length 68.2
  Top Layer w0.2: DD12.14 13.625,37.195 16.595,37.195 v1(16.6,37.2)
  Bottom Layer w0.2: v1(16.6,37.2) 18.399,37.2 23.163,41.965 57.714,41.965 58.69,40.989 64.14,40.989 65.305,42.153 69.788,42.153 70.232,42.597 70.232,47.331 70,47.563 DD10.13
NetDD14_12: DD14.12 VD7.1 | length 66.4
  Top Layer w0.2: DD14.12 20.54,24.883 20.598,24.942 v1(20.598,24.95) ; VD7.1 73,15.356 74.044,16.4 v1(74.8,16.4)
  Bottom Layer w0.2: v1(20.598,24.95) 20.677,25.029 20.685,25.029 21.357,25.7 70.2,25.7 74.8,21.1 v1(74.8,16.4)
VCC: DD1.10 DD1.13 DD1.14 DD2.2 DD2.14 DD3.14 DD4.2 DD4.14 DD5.14 DD6.14 DD7.5 DD7.14 DD8.16 DD9.16 DD10.5 DD11.14 DD12.16 DD13.16 R8.2 XP3.1 | length 357.1
  Top Layer w0.3: DD12.16 11.85,34.65 9.272,37.228 ; DD11.14@14.795,57.869 14.92,57.994 DD11.14 14.92,59.924 14.744,60.1 11.676,60.1 11.5,59.924 11.5,47.076 11.324,46.9 3.176,46.9 3,46.724 3,41.776 3.276,41.5 XP3.1 9.272,37.228 ; DD1.10 18.776,9.54 18.6,9.364 18.6,5.906 18.776,5.73 DD1.13 DD1.14 18.476,4.46 18.3,4.284 18.3,2.171 18.124,1.996 10.796,1.996 9.272,3.52 9.272,37.228 ; R8.2 R8.2@31.116,27.95 ; v1(31.116,29.021) R8.2@31.116,27.95 ; DD8.16 38.35,41.67 38.32,41.64 ; DD4.14 41.657,42.91 ; v1(43.969,17.54) 43.969,15.61 43.549,15.19 41.1,15.19 37.436,18.854 37.436,23.794 33.28,27.95 31.929,27.95 ; DD2.14 46.972,5.05 ; v1(47.906,5.983) 46.972,5.05 ; DD2.2 49.765,5.7 49.115,5.05 46.972,5.05 ; DD5.14 52.35,53.532 51.768,52.95 50.522,52.95 50.496,52.975 50.496,55.583 ; DD6.14 54.19,44.388 53.341,44.388 ; v1(56.7,19.8) 58.919,19.8 58.92,19.801 DD7.14 ; v1(63.984,19.699) 63.984,15.6 DD7.5 64,14.569 ; DD3.14 66.35,7.072 65.711,7.711 65.711,12.832 64,14.543 64,14.569 ; DD10.5 67.5,59.742 63.341,55.583 50.496,55.583 ; DD13.16 66.282,36.19 65.863,35.771 65.863,14.569 65.838,14.543 64.025,14.543 64,14.569 ; R8.2@31.116,27.95 31.929,27.95 ; 31.929,27.95 32.225,28.246 32.225,39.045 34.82,41.64 DD4.2 38.32,41.64 ; 38.32,41.64 39.346,41.64 40.616,42.91 41.657,42.91 ; 41.657,42.91 41.632,42.885 41.632,41.086 41.657,41.061 43.725,41.061 43.75,41.035 43.75,39.422 44.195,38.978 47.931,38.978 53.341,44.388 ; 50.496,55.583 48.242,55.583 47.956,55.297 47.956,44.82 48.388,44.388 53.341,44.388
  Bottom Layer w0.3: XP3.1 5,40.418 16.397,29.021 v1(31.116,29.021) ; v1(43.969,17.54) 46.204,19.776 ; v1(47.906,5.983) 49.912,5.983 59.64,15.712 59.64,18.887 58.727,19.8 v1(56.7,19.8) 46.228,19.8 46.204,19.776 ; v1(63.984,19.699) 63.984,20.055 63.552,20.487 46.915,20.487 46.204,19.776
pads on no net: DA1.3 DA1.5 DA1.6 DA1.7 DA1.8 DD3.4 DD3.5 DD3.6 DD3.8 DD3.9 DD3.10 DD3.11 DD3.12 DD3.13 DD6.8 DD6.9 DD6.10 DD6.11 DD6.12 DD6.13 DD7.8 DD7.9 DD7.10 DD7.11 DD8.1 DD8.5 DD8.7 DD8.9 DD8.10 DD8.11 DD8.12 DD8.15 DD9.1 DD9.5 DD9.9 DD9.10 DD9.11 DD9.12 DD9.15 DD10.8 DD10.12 DD10.14 DD11.3 DD11.4 DD11.5 DD11.6 DD11.8 DD11.9 DD11.10 DD11.11 DD12.1 DD12.5 DD12.9 DD12.10 DD12.11 DD12.12 DD12.15 DD13.1 DD13.5 DD13.7 DD13.9 DD13.10 DD13.11 DD13.12 DD13.15 DD14.7 DD14.14

## Polygon pours and split planes (outlines as drawn)
VCC on Top Layer "VCC_L01_P001" (solid, remove dead copper, pour order 1): 8,66 8,48.871 1.645,48.871 1.455,38.979 8,38.694 8,0 26,0 26,66
GND on Top Layer "GND_L01_P002" (solid, remove dead copper, pour order 2): 21,66 21,0 30,0 85,0 85,3 85,66
GND on Bottom Layer "GND_L02_P000" (solid, remove dead copper, pour order 0): 0,0 0,66 85,66 85,0

## Silkscreen, mask and mechanical layers (free items; w line width, h text height)
Mechanical 1:
  the board outline again, w0.254
Drill Drawing:
  circle w0.254: c94.004,28.921 r0.524
  lines w0.254: 93.481,26.303 93.743,26.303 94.004,26.041 94.266,26.303 94.528,26.303 94.266,26.565 94.528,26.826 94.266,26.826 94.004,27.088 93.743,26.826 93.481,26.826 93.743,26.565 93.481,26.303 ; 93.481,31.801 94.528,31.801 94.004,30.754 93.481,31.801 ; 93.481,33.11 94.528,33.11 94.528,34.157 93.481,34.157 93.481,33.11 ; 93.481,35.728 93.743,35.728 93.743,35.466 94.266,35.466 94.266,35.728 94.528,35.728 94.528,36.252 94.266,36.252 94.266,36.514 93.743,36.514 93.743,36.252 93.481,36.252 93.481,35.728
  lines w0.5: 90.204,37.116 118.703,37.116 ; 97.463,25.334 97.463,39.472 ; 102.976,25.334 102.976,39.472 ; 111.193,25.334 111.193,39.472 ; 90.204,25.334 118.703,25.334 118.703,39.472 90.204,39.472 90.204,25.334
  text "Позначення" at 91.618,37.823 h1.35
  text "Кількість" at 98.17,37.823 h1.35
  text "Розмір" at 103.683,37.823 h1.35
  text "Металізація" at 111.899,37.823 h1.35
  text "4" at 100.034,35.466 h1.13
  text "3,20mm (125,98mil)" at 103.683,35.466 h1.13
  text "PTH" at 113.822,35.466 h1.13
  text "6" at 99.991,33.11 h1.13
  text "1,00mm (39,37mil)" at 103.998,33.11 h1.13
  text "PTH" at 113.822,33.11 h1.13
  text "8" at 99.969,30.754 h1.13
  text "0,55mm (21,65mil)" at 103.965,30.754 h1.13
  text "PTH" at 113.822,30.754 h1.13
  text "16" at 99.893,28.397 h1.13
  text "0,60mm (23,62mil)" at 103.833,28.397 h1.13
  text "PTH" at 113.822,28.397 h1.13
  text "84" at 99.791,26.041 h1.13
  text "0,50mm (19,69mil)" at 103.912,26.041 h1.13
  text "PTH" at 113.822,26.041 h1.13